# Altium PCB PCB_SWatch_VER1.PcbDoc
Units mm, origin at the board's own origin, x right, y up, seen from the top; angles counter-clockwise.
Board outline 38 x 46 mm, 2 copper layers (Top Layer, Bottom Layer); 57 components, 42 nets, 244 pads, 86 vias.
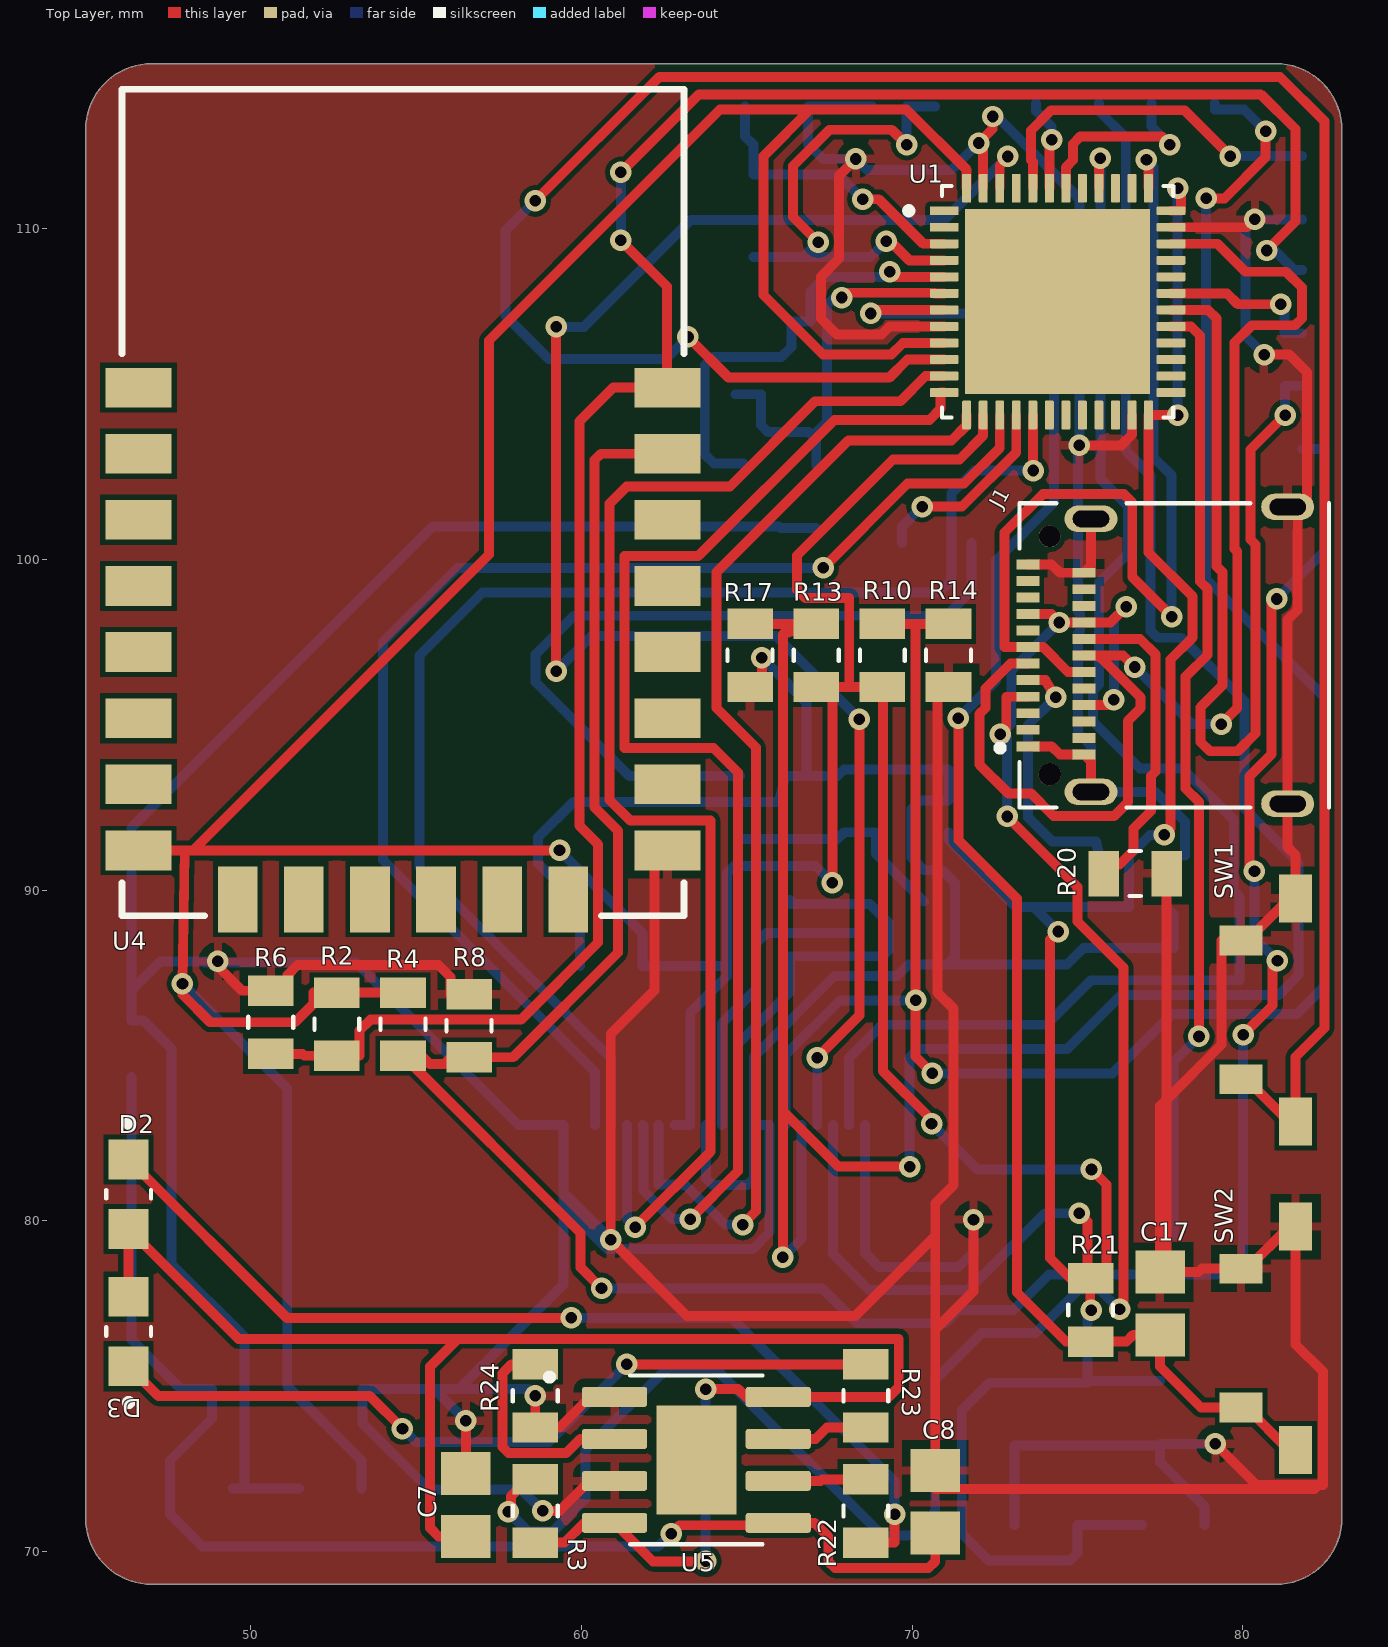
[diagram p0: Top Layer view]
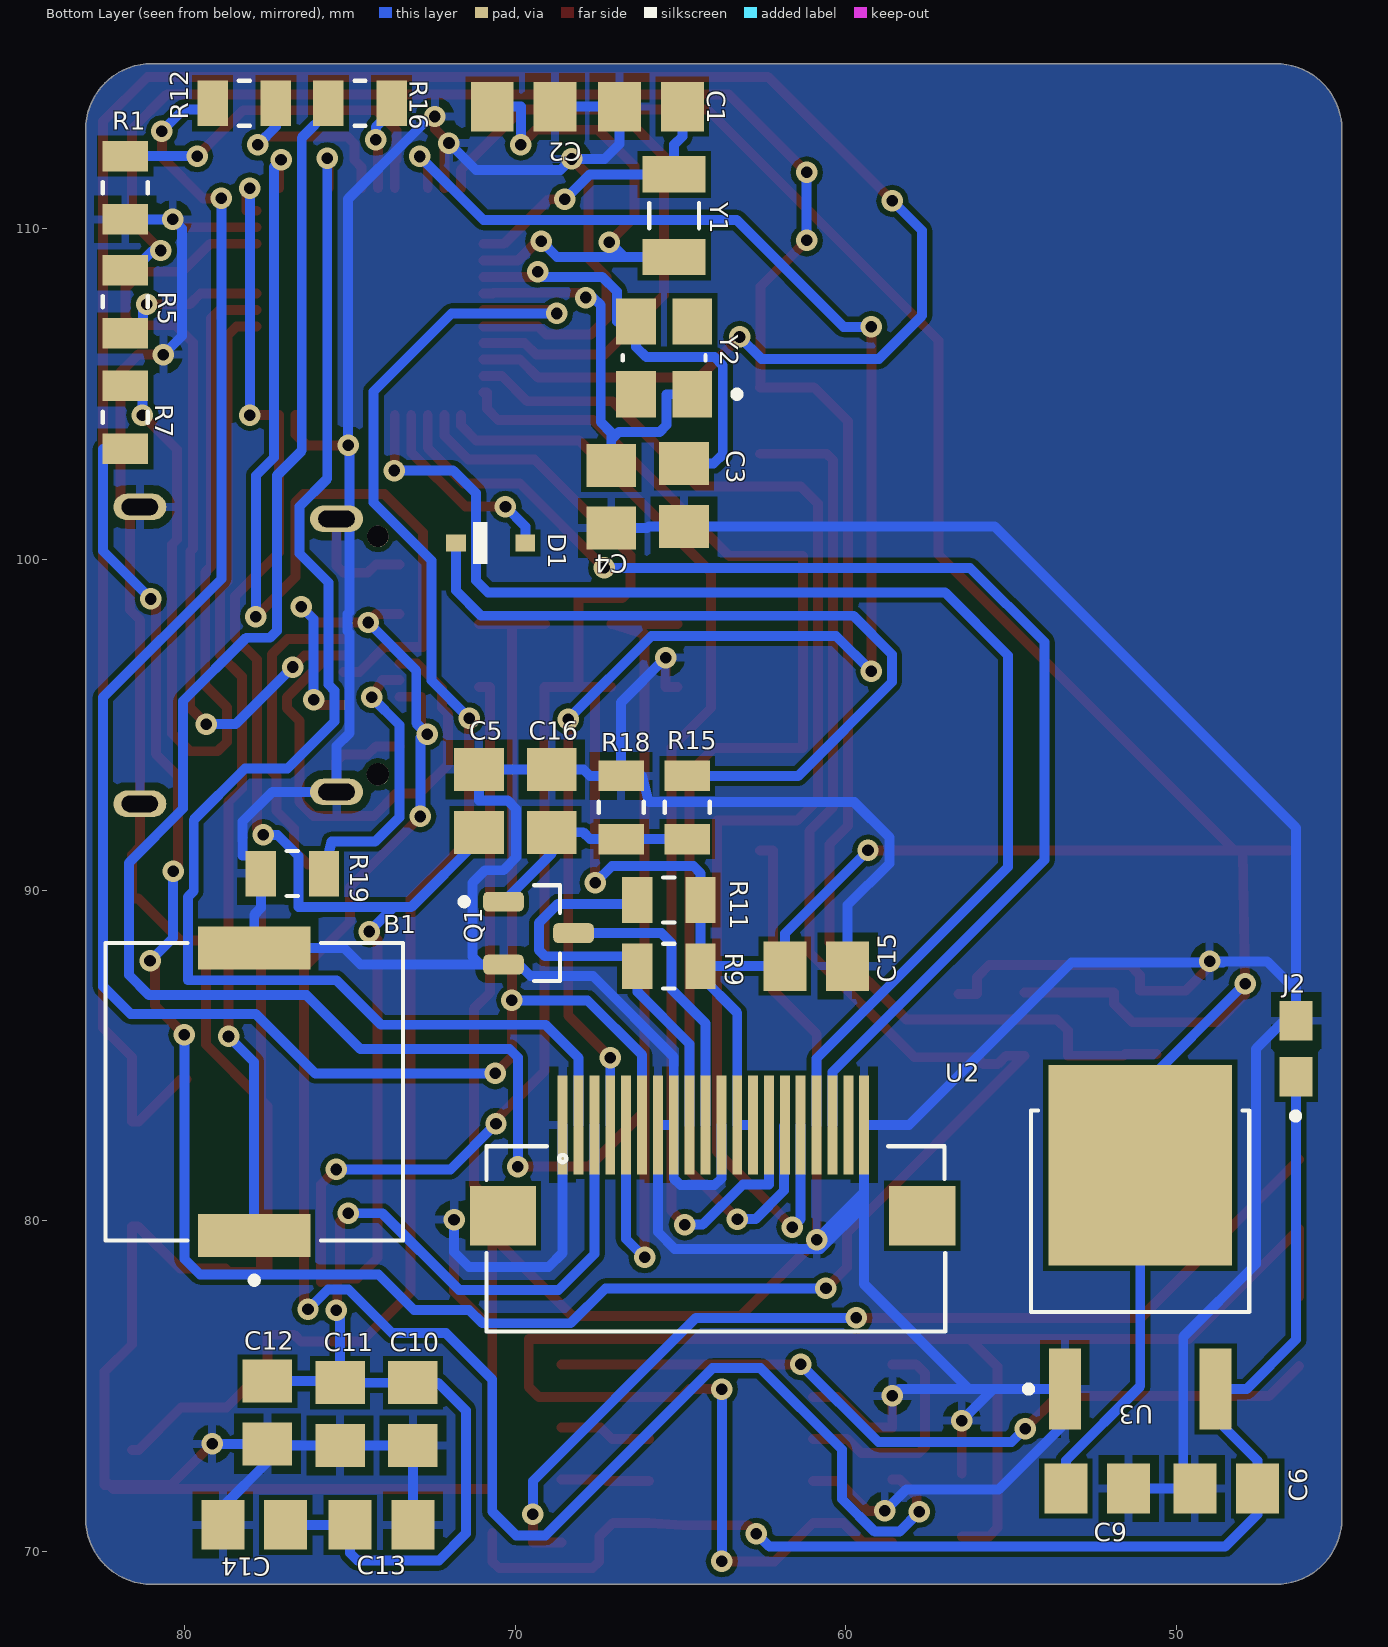
[diagram p1: Bottom Layer view, seen from below]
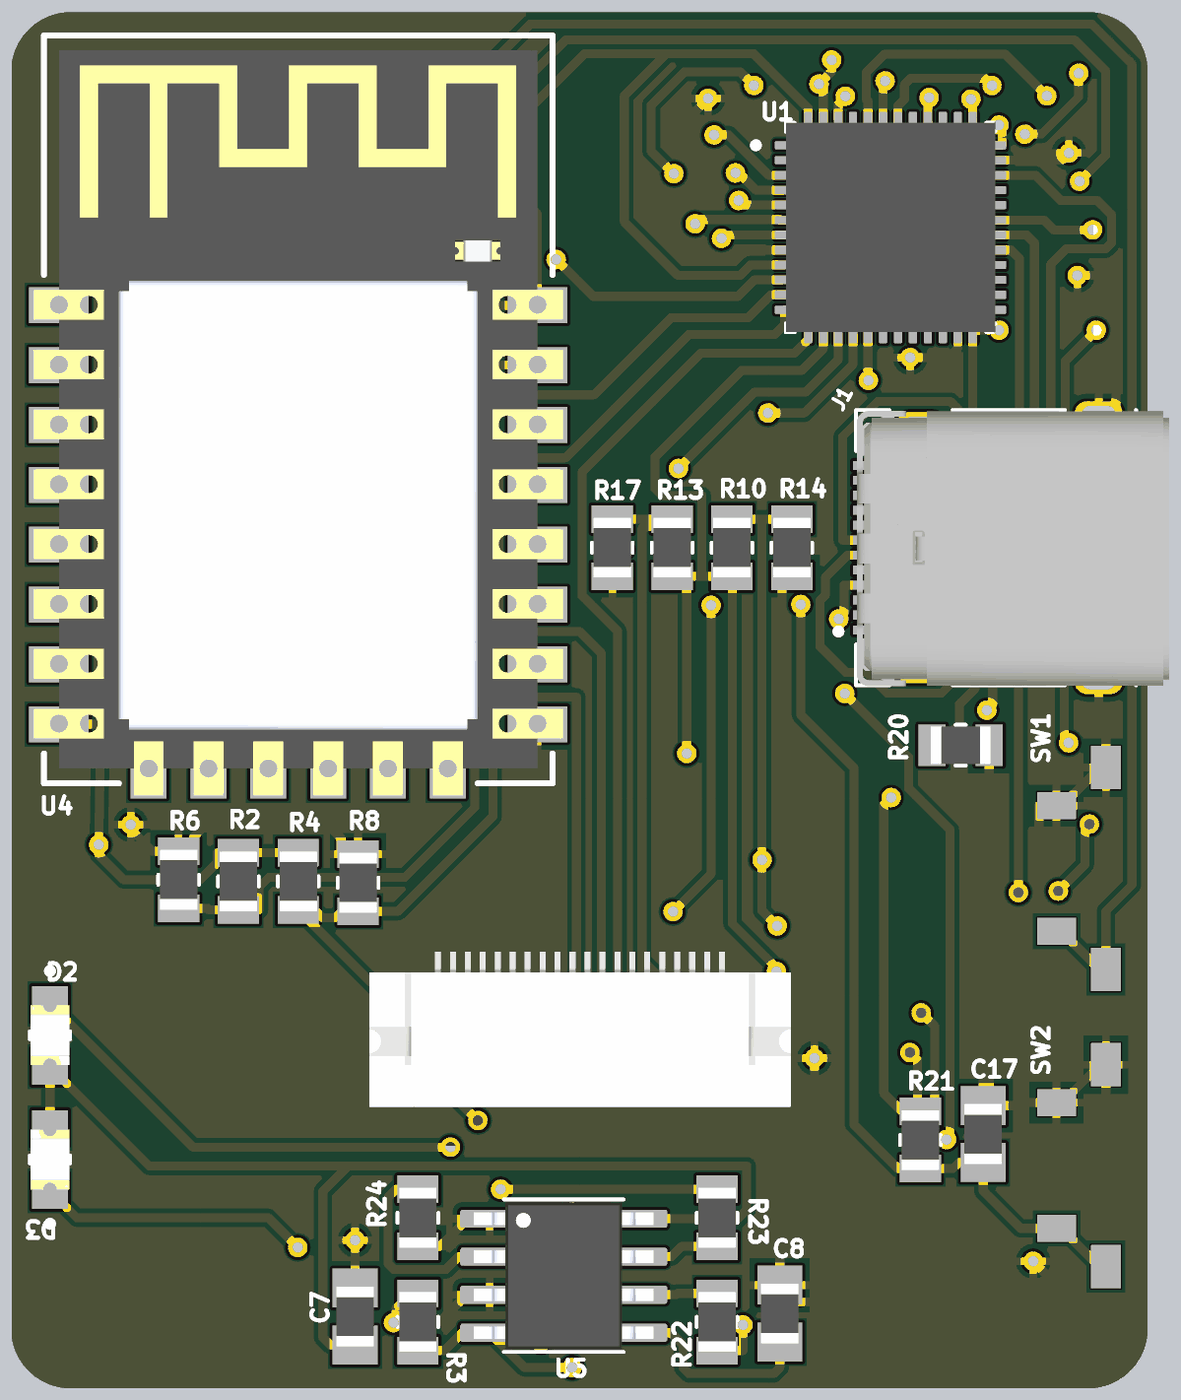
[diagram p2: 3D render of the assembled board from above, using the file's embedded part models]
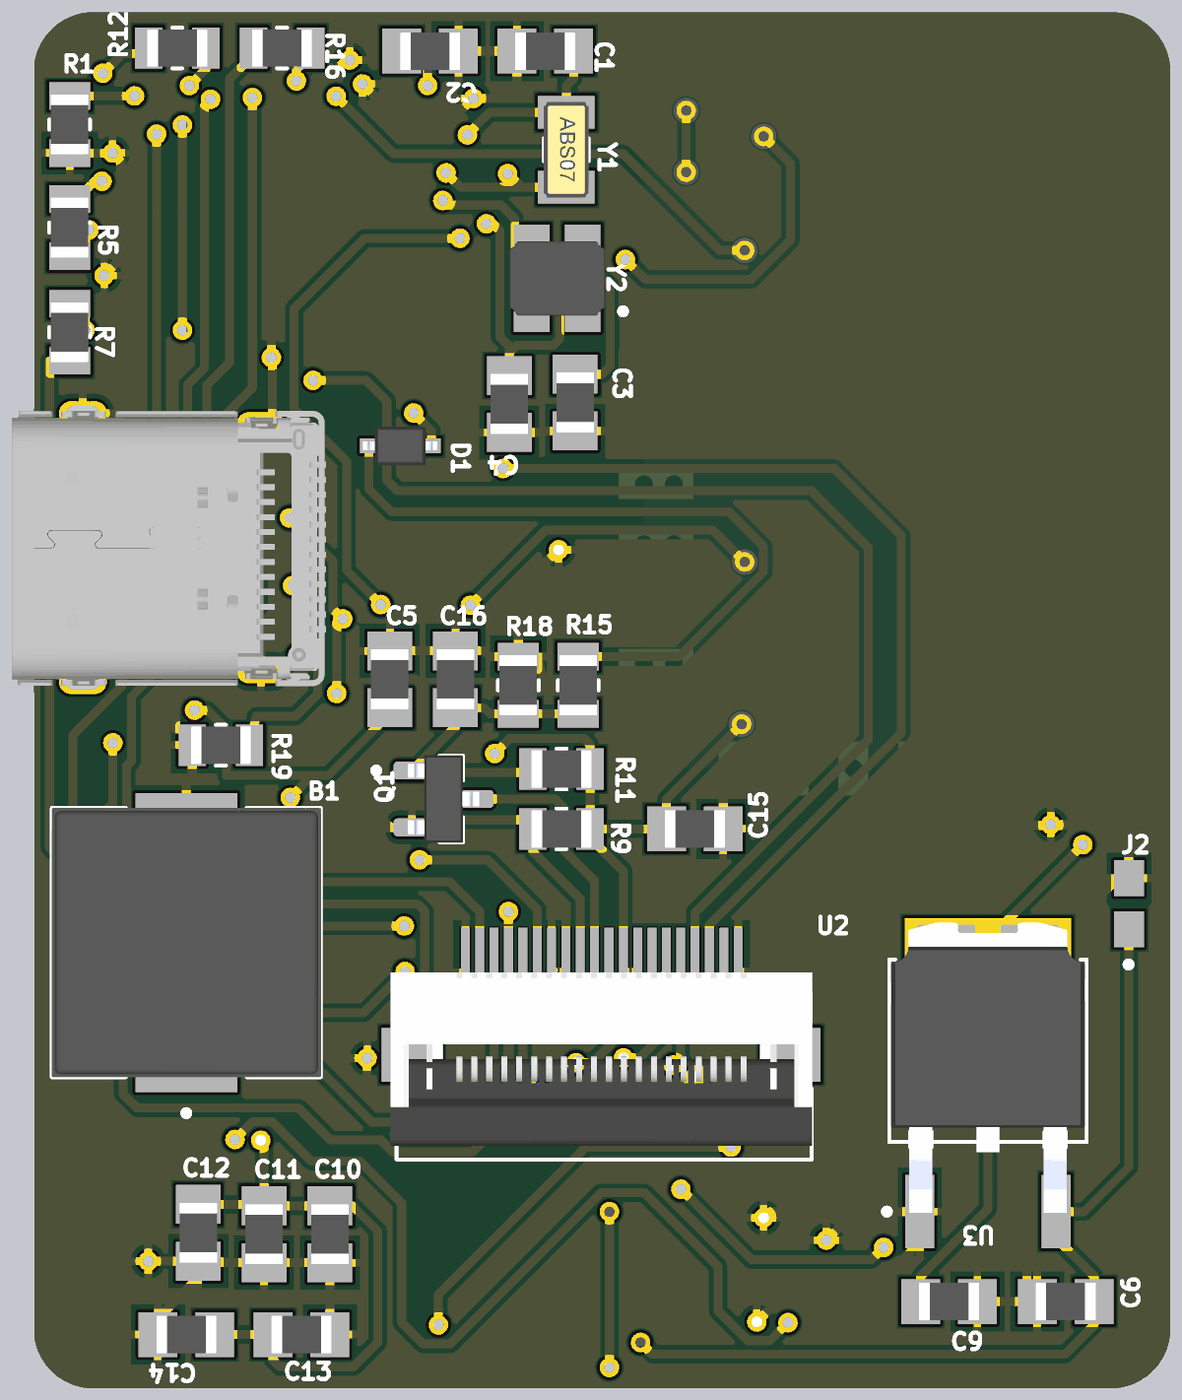
[diagram p3: 3D render of the assembled board from below, using the file's embedded part models]

## Layer stack, top to bottom
Top Solder: solder mask 0.0102, Solder Resist, Dk 3.5
Top Layer: signal copper 0.0356
Dielectric 1: dielectric 0.32, FR-4, Dk 4.8
Bottom Layer: signal copper 0.0356
Bottom Solder: solder mask 0.0102, Solder Resist, Dk 3.5

## Board outline
47,69 cw(c47,71) 45,71 45,113 cw(c47,113) 47,115 81,115 cw(c81,113) 83,113 83,71 cw(c81,71) 81,69

## Design rules (kind name [scope] priority, off if disabled: settings)
Clearance [All] p1: gap=0.152 ignorepadtopadclearanceinfootprint=FALSE
HoleSize [All] p1: absolutevalues=TRUE maxlimit=3.5 minlimit=0.025 maxpercent=80.000 minpercent=20.000
HoleToHoleClearance [All] p1: gap=0.056 allowstackedmicrovias=TRUE
MinimumSolderMaskSliver [All] p1: minsoldermaskwidth=0.003
PolygonConnect [All] p1: connectstyle=Relief reliefconductorwidth=0.254 reliefentries=4 polygonreliefangle="90 Angle" airgapwidth=0.254
RoutingVias [All] p1: holewidth=0.35 width=0.65 viastyle="Through Hole" minholewidth=0.3 minwidth=0.6 maxholewidth=0.4 maxwidth=0.8
SilkToSilkClearance [All] p1: silktosilkclearance=0.008
SilkToSolderMaskClearance [IsPad] p1: minsilkscreentomaskgap=0.01 clearancetoexposedcopper=TRUE
SolderMaskExpansion [All] p1: expansion=0.102
Width [All] p1: maxlimit=0.5 minlimit=0.254 preferedwidth=0.3 minimp=50.000000 maximp=50.000000 favimp=50.000000
25 further rules are at their usual default settings.

## Classes and differential pairs
component class SWatch_Schematic_2: B1 C6 C7 C8 C9 C17 D2 D3 J1 J2 R3 R19 R20 R21 R22 R23 R24 SW2 U3 U4 U5
component class SWatch_Schematic_1: C1 C2 C3 C4 C5 C10 C11 C12 C13 C14 C15 C16 D1 Q1 R1 R2 R4 R5 R6 R7 R8 R9 R10 R11 R12 R13 R14 R15 R16 R17 R18 SW1 U1 U2 Y1 Y2

## Components (designator, comment, footprint, x,y, rotation, side; value= is the part's Value field where it differs from the comment)
B1 "SMD BUZZER" "SMD BUZZER" 77.9,83.9 r90 bottom
C1 "4.3pF" "4.3 pF C805" 65.9,113.7 r180 bottom
C2 "4.3pF" "4.3 pF C805" 69.75,113.7 r0 bottom
C3 "12pF" "12pF C805" 64.9,101.95 r90 bottom
C4 "12pF" "12pF C805" 67.1,101.9 r90 bottom
C5 "0.1 uF C805" "0.1 uF C805" 71.1,92.7 r90 bottom
C6 "100 nF" "100 nF C805" 48.5,71.9 r0 bottom
C7 "10 uF" "10uF C805" 56.5,71.4 r90 top
C8 "10 uF" "10uF C805" 70.7,71.5 r90 top
C9 "10 uF" "10uF C805" 52.4,71.9 r180 bottom
C10 "100 nF" "100 nF C805" 73.1,74.15 r270 bottom
C11 "100 nF" "100 nF C805" 75.3,74.15 r270 bottom
C12 "100 nF" "100 nF C805" 77.5,74.2 r270 bottom
C13 "100 nF" "100 nF C805" 74.05,70.8 r180 bottom
C14 "100 nF" "100 nF C805" 77.9,70.8 r0 bottom
C15 "1 uF C805" "1 uF C805" 60.9,87.7 r0 bottom
C16 "10nF C805" "4.3 pF C805" 68.9,92.7 r270 bottom
C17 "100 nF" "100 nF C805" 77.5,77.5 r90 top
D1 "1N4148WS-7-F Diyot" "1N4148WS-7-F Diyot" 70.75,100.5 r180 bottom
D2 "805 led" led 46.3,80.8 r270 top
D3 "805 led" led 46.3,76.65 r90 top
J1 "12401832E402A TYPE-C" "12401832E402A TYPE-C" 74.16,97.1 r90 top
J2 "BAT +-" "BAT -+" 46.4,85.2 r90 bottom
Q1 "BC848CLT1G NPN Transistör" "BC848CLT1G NPN Transistör" 69.3,88.7 r180 bottom
R1 "10K R805" "10K R805" 81.8,111.245 r270 bottom
R2 "10K R805" "10K R805" 52.6,85.945 r90 top
R3 "0.4 ohm R805" "1K R805" 58.6,71.22 r90 top
R4 "10K R805" "10K R805" 54.6,85.945 r90 top
R5 "10K R805" "10K R805" 81.8,107.8 r270 bottom
R6 "10K R805" "10K R805" 50.6,86 r270 top
R7 "10K R805" "10K R805" 81.8,104.3 r90 bottom
R8 "10K R805" "10K R805" 56.6,85.9 r270 top
R9 "RA1 R805" "1K R805" 65.355,87.7 r0 bottom
R10 "10K R805" "10K R805" 69.1,97.1 r270 top
R11 "RA2 R805" "1K R805" 65.355,89.7 r0 bottom
R12 "10K R805" "10K R805" 78.2,113.8 r0 bottom
R13 "10K R805" "10K R805" 67.1,97.1 r270 top
R14 "10K R805" "10K R805" 71.1,97.1 r90 top
R15 "1K R805" "1K R805" 64.8,92.5 r270 bottom
R16 "10K R805" "10K R805" 74.7,113.8 r0 bottom
R17 "10K R805" "10K R805" 65.1,97.1 r90 top
R18 "5k R805" "1.2K R805" 66.8,92.5 r270 bottom
R19 "5.1K R805" "1K R805" 76.745,90.5 r180 bottom
R20 "5.1K R805" "1K R805" 76.745,90.5 r0 top
R21 "10K R805" "10K R805" 75.4,77.3 r270 top
R22 "1K R805" "1K R805" 68.6,71.22 r270 top
R23 "1K R805" "1K R805" 68.6,74.7 r90 top
R24 "1.2K R805" "1.2K R805" 58.6,74.7 r270 top
SW1 "WakeUP BTN" "WakeUp BTN" 81.5,86.43 r90 top
SW2 "WakeUP BTN" "WakeUp BTN" 81.5,76.5 r90 top
U1 "STM32F411CEU6" STM32F411CEU6 74.4,107.8 r0 top
U2 "FPC" FPC 63.82,82.9 r180 bottom
U3 "LD1117DT3.3V" LD1117DT3.3V 51.1,79.2 r90 bottom
U4 "ESP8266" ESP8266 54.6,101.72 r0 top
U5 "TP4056" TP4056 63.475,72.765 r0 top
Y1 "RTC Kristal" "32.768 KHZ RTC" 65.2,110.4 r270 bottom
Y2 "ABM8G25000MHZ4YT3" ABM8G25000MHZ4YT3 65.5,106.1 r0 bottom

## Footprints (in the part's own frame and the unit in brackets; to place one, negate y for a bottom-side part, rotate by r counter-clockwise, add the part's x,y. Pads: shape width x height; smd on the part's side, far side on the other; paste and mask are expansions set on the pad)
"0.1 uF C805" [mm]
  rect 1.3x1.5 smd: 1(-0.95,0) 2(0.95,0)
  body extent -1,-0.62 1,0.63, height 0.3
"1 uF C805" [mm]
  rect 1.3x1.5 smd: 1(-0.95,0) 2(0.95,0)
  body extent -1,-0.62 1,0.63, height 0.3
"1.2K R805" [mm]
  rect 0.92x1.38 smd: 1(-0.955,0) 2(0.955,0)
  silkscreen extent -0.17,-0.68 0.17,0.68, body extent -1,-0.62 1,0.63, height 0.6
"1K R805" [mm]
  rect 0.92x1.38 smd: 1(-0.955,0) 2(0.955,0)
  silkscreen extent -0.17,-0.68 0.17,0.68, body extent -1,-0.62 1,0.62, height 0.6
"1N4148WS-7-F Diyot" [mm]
  rect 0.6x0.5 smd: A(1.05,0) C(-1.05,0)
  silkscreen extent -0.53,-0.63 -0.1,0.63, body extent -1.25,-0.65 1.25,0.65, height 1.2
"4.3 pF C805" [mm]
  rect 1.3x1.5 smd: 1(-0.95,0) 2(0.95,0)
  body extent -1,-0.62 1,0.63, height 0.3
"10K R805" [mm]
  rect 0.92x1.38 smd: 1(-0.955,0) 2(0.955,0)
  silkscreen extent -0.17,-0.68 0.17,0.68, body extent -1,-0.62 1,0.63, height 0.6
"10uF C805" [mm]
  rect 1.3x1.5 smd: 1(-0.95,0) 2(0.95,0)
  body extent -1,-0.62 1,0.63, height 0.3
"12pF C805" [mm]
  rect 1.3x1.5 smd: 1(-0.95,0) 2(0.95,0)
  body extent -1,-0.62 1,0.63, height 0.3
"32.768 KHZ RTC" [mm]
  rect 1.1x1.9 smd: 1(-1.25,0) 2(1.25,0)
  silkscreen extent -0.38,-0.75 0.38,0.75, body extent -1.6,-0.75 1.6,0.75, height 0.89
"100 nF C805" [mm]
  rect 1.3x1.5 smd: 1(-0.95,0) 2(0.95,0)
  body extent -1,-0.62 1,0.63, height 0.3
"12401832E402A TYPE-C" [mm]
  rect 0.3x0.7 smd: A1(-2.75,0.66) A2(-2.25,0.66) A3(-1.75,0.66) A4(-1.25,0.66) A5(-0.75,0.66) A6(-0.25,0.66) A7(0.25,0.66) A8(0.75,0.66) A9(1.25,0.66) A10(1.75,0.66) A11(2.25,0.66) A12(2.75,0.66) B1(2.5,-1.04) B2(2,-1.04) B3(1.5,-1.04) B4(1,-1.04) B5(0.5,-1.04) B6(0,-1.04) B7(-0.5,-1.04) B8(-1,-1.04) B9(-1.5,-1.04) B10(-2,-1.04) B11(-2.5,-1.04) B12(-3,-1.04)
  oval 0.8x1.6 hole 0.5 slot 1.1 at 90 deg: S1(-4.13,-1.25) S2(4.13,-1.25) S3(4.49,-7.2) S4(-4.49,-7.2)
  round 0.675 hole 0.675 unplated: ""(-3.6,0)
  round 0.65 hole 0.65 unplated: ""(3.6,0)
  silkscreen extent -4.6,-8.45 4.6,1.6, body extent -4.63,-9.56 4.57,0.93, height 1.7
ABM8G25000MHZ4YT3 [mm]
  rect 1.2x1.4 smd: 1(-0.85,1.1) 2(-0.85,-1.1) 3(0.85,-1.1) 4(0.85,1.1)
  silkscreen extent -2.3,-0.08 1.25,1.2, body extent -1.6,-1.24 1.6,1.24, height 0.99
"BAT -+" [mm]
  rect 1.2x1 smd: 1(-0.85,-0.015) 2(0.85,-0.015)
  silkscreen extent -2.08,-0.05 -1.98,0.05
"BC848CLT1G NPN Transistör" [mm]
  rrect50% 1.23x0.6 smd: 1(-1.06,0.95) 2(-1.06,-0.95) 3(1.06,0)
  silkscreen extent -2.35,-1.45 0.65,1.45, body extent -1.2,-1.46 1.2,1.46, height 1.2
ESP8266 [mm]
  rect 2x1.2 smd: 1(-8,3.48) 2(-8,1.48) 3(-8,-0.52) 4(-8,-2.52) 5(-8,-4.52) 6(-8,-6.52) 7(-8,-8.52) 8(-8,-10.52) 15(8,-10.52) 16(8,-8.52) 17(8,-6.52) 18(8,-4.52) 19(8,-2.52) 20(8,-0.52) 21(8,1.48) 22(8,3.48)
  rect 1.2x2 smd: 9(-5,-12) 10(-3,-12) 11(-1,-12) 12(1,-12) 13(3,-12) 14(5,-12)
  silkscreen extent -8.5,-12.5 8.5,12.5, body extent -8.85,-12.9 8.85,12
FPC [mm]
  rect 0.3x3 smd mask+0.05: 1(-4.75,0) 2(-4.27,0) 3(-3.79,0) 4(-3.31,0) 5(-2.83,0) 6(-2.35,0) 7(-1.87,0) 8(-1.39,0) 9(-0.91,0) 10(-0.43,0) 11(0.05,0) 12(0.53,0) 13(1.01,0) 14(1.49,0) 15(1.97,0) 16(2.45,0) 17(2.93,0) 18(3.41,0) 19(3.89,0) 20(4.37,0)
  rect 2x1.8 smd: S1(-6.55,-2.75) S2(6.125,-2.75)
  silkscreen extent -7.05,-6.25 6.82,-0.65, body extent -7.25,-5.8 6.85,0.7, height 1.1
LD1117DT3.3V [mm]
  rect 2.44x0.97 smd: 1(-4.29,2.28) 3(-4.29,-2.28)
  rect 6.07x5.55 smd paste-4: 4(2.48,0)
  silkscreen extent -4.39,-3.3 4.13,3.48, body extent -4.36,-3.25 5.36,3.25, height 2.17
led [mm]
  rect 1.2x1.2 smd: 1(-1.05,0) 2(1.05,0)
  silkscreen extent -2.25,-0.67 0.13,0.68, body extent -1,-0.65 1,0.65, height 0.8
"SMD BUZZER" [mm]
  rect 1.3x3.4 smd: 1(-4.35,0) 2(4.35,0)
  silkscreen extent -5.8,-4.5 4.5,4.5, body extent -4.5,-4.5 4.5,4.5, height 1.9
STM32F411CEU6 [mm]
  rrect25% 0.87x0.27 smd: 1(-3.429,2.75) 2(-3.43,2.25) 3(-3.43,1.75) 4(-3.43,1.25) 5(-3.43,0.75) 6(-3.43,0.25) 7(-3.43,-0.25) 8(-3.43,-0.75) 9(-3.43,-1.25) 10(-3.43,-1.75) 11(-3.43,-2.25) 12(-3.43,-2.75) 25(3.43,-2.75) 26(3.43,-2.25) 27(3.43,-1.75) 28(3.43,-1.25) 29(3.43,-0.75) 30(3.43,-0.25) 31(3.43,0.25) 32(3.43,0.75) 33(3.43,1.25) 34(3.43,1.75) 35(3.43,2.25) 36(3.43,2.75)
  rrect25% 0.27x0.87 smd: 13(-2.75,-3.43) 14(-2.25,-3.43) 15(-1.75,-3.43) 16(-1.25,-3.43) 17(-0.75,-3.43) 18(-0.25,-3.43) 19(0.25,-3.43) 20(0.75,-3.43) 21(1.25,-3.43) 22(1.75,-3.43) 23(2.25,-3.43) 24(2.75,-3.43) 37(2.75,3.43) 38(2.25,3.43) 39(1.75,3.43) 40(1.25,3.43) 41(0.75,3.43) 42(0.25,3.43) 43(-0.25,3.43) 44(-0.75,3.43) 45(-1.25,3.43) 46(-1.75,3.43) 47(-2.25,3.43) 48(-2.75,3.43)
  rect 5.6x5.6 smd paste-4: 49(0,0)
  silkscreen extent -4.6,-3.5 3.5,3.5, body extent -3.5,-3.5 3.5,3.5, height 0.6
TP4056 [mm]
  rrect25% 1.97x0.6 smd: 1(-2.475,1.905) 2(-2.475,0.635) 3(-2.475,-0.635) 4(-2.475,-1.905) 5(2.475,-1.905) 6(2.475,-0.635) 7(2.475,0.635) 8(2.475,1.905)
  rect 2.413x3.302 smd paste-3: 9(0,0)
  silkscreen extent -4.54,-2.55 2,2.6, body extent -3,-2.45 3,2.45, height 1.75
"WakeUp BTN" [mm]
  rect 1.45x1 smd mask+0.05: 1(-3.43,-0.1) 2(3.32,-0.1)
  rect 0.9x1.3 smd mask+0.05: 3(-2.15,1.55) 4(2.05,1.55)

## Part data
B1: "PKMCS0909E4000-R1"

## Via types
v1: diameter 0.65, hole 0.35, Top Layer to Bottom Layer, 86 vias

## Nets (pads, with @x,y where several pads share a name; then routed paths per layer and width w, separated by ;. In a path a pad name is that pad's centre, name@x,y a point inside that pad or via, vN(x,y) a via of type N, cw(c..) or ccw(c..) an arc to the next point about the centre after c; other vN are vias at no path point)
3.3V: C5.1 C9.1 C10.1 C11.1 C12.1 C13.1 C14.1 C15.2 R2.2 R4.2 R9.1 R10.2 R11.1 R13.2 R21.1 U1.9 U1.14 U1.24 U1.36 U1.48 U2.3 U2.12 U2.13 U3.4 U4.8 | length 235.3
  Top Layer w0.3: U4.8 48,91.2 ; R4.2 R2.2 51.892,86.9 51.892,86.563 51.333,86.004 48.768,86.004 47.93,86.843 v1(47.93,87.173) 48,91.2 ; v1(59.334,91.2) 48.249,91.2 ; R13.2 R13.2@67.589,96.145 ; v1(67.589,90.221) R13.2@67.589,96.145 ; v1(70.587,82.931) 70.587,83.058 69.113,84.531 69.113,96.145 R10.2 68.097,96.145 ; U1.9 69.72,106.55 69.37,106.2 67.3,106.2 65.5,108 65.5,112.2 66.914,113.614 ; U1.48 71.65,111.789 69.825,113.614 66.914,113.614 ; U1.14 72.15,103.748 71.428,103.026 69.426,103.026 66.523,100.123 66.523,99.077 66.769,98.831 68.097,98.831 68.097,96.145 ; v1(74.422,88.748) 74.175,88.501 74.175,78.875 74.795,78.255 R21.1@75.159,78.255 ; v1(75.05,80.225) 75.3,79.975 75.3,78.396 R21.1@75.159,78.255 ; v1(75.413,77.292) 75.387,77.318 R21.1@75.387,78.255 ; v1(75.425,81.55) 75.875,81.1 75.875,78.152 75.399,78.252 R21.1@75.387,78.255 ; U1.24 U1.24@77.15,104.369 ; v1(77.622,91.669) 77.815,91.862 77.815,96.971 78.478,97.634 78.478,98.888 77.15,100.216 U1.24@77.15,104.369 ; U1.36 78.13,110.55 78.13,111.125 v1(78.029,111.227) ; v1(78.029,104.369) U1.24@77.15,104.369 ; 48,91.2 48.249,91.2 ; 48.249,91.2 57.201,100.152 57.201,106.629 64.186,113.614 66.914,113.614 ; R13.2@67.589,96.145 68.097,96.145 ; R21.1@75.159,78.255 R21.1@75.387,78.255
  Bottom Layer w0.3: v1(47.93,87.173) 51.1,84.003 U3.4 51.1,74.996 53.35,72.746 C9.1 ; v1(59.334,91.2) 61.85,88.684 C15.2 R9.1 ; U2.13 U2.12 63.29,86.29 64.4,87.4 R9.1 ; v1(67.589,90.221) 67.081,90.729 64.618,90.729 64.4,90.511 R11.1 R9.1 ; U2.3 67.61,78.99 68.7,77.9 71.7,77.9 74.025,80.225 v1(75.05,80.225) ; v1(70.587,82.931) 71.968,81.55 v1(75.425,81.55) ; C5.1 71.1,91.536 73.152,89.484 73.685,89.484 ; v1(74.422,88.748) 73.685,89.484 ; v1(75.413,77.292) 75.3,77.18 C11.1 ; C14.1 C13.1 75,69.945 74.778,69.723 72.314,69.723 71.5,70.537 71.5,74.261 72.339,75.1 C10.1 C11.1 ; C12.1 75.35,75.15 C11.1 ; v1(77.622,91.669) 77.191,91.669 76.556,91.034 76.556,89.484 73.685,89.484 ; v1(78.029,104.369) v1(78.029,111.227)
GND: B1.2 C1.1 C2.1 C3.1 C4.1 C5.2 C6.2 C7.2 C8.2 C9.2 C10.2 C11.2 C12.2 C13.2 C14.2 C15.1 C16.1 C17.2 J1.A1 J1.A12 J1.B1 J1.B12 J1.S1 J1.S2 J1.S3 J1.S4 J2.2 Q1.2 R1.2 R6.1 R8.1 R14.1 R17.1 R18.1 R19.1 R20.2 R24.2 SW1.2 SW1.4 SW2.2 SW2.4 U1.8 U1.23 U1.35 U1.47 U2.1 U2.7 U2.8 U2.11 U2.20 U3.1 U4.15 U5.1 U5.3 | length 382.7
  Top Layer w0.3: v1(49,87.844) 49,87.688 49.733,86.955 R6.1 51.105,86.955 51.105,87.427 51.41,87.732 55.677,87.732 56.032,87.376 56.032,86.855 R8.1 ; C7.2 v1(56.5,73.954) ; v1(58.598,74.701) 58.6,74.699 R24.2 59.334,73.745 60.259,74.67 U5.1 ; v1(58.826,71.222) 59.334,71.222 60.243,72.13 U5.3 ; U4.15 62.205,91.2 62.205,86.97 60.884,85.649 v1(60.884,79.426) 63.194,77.115 68.281,77.115 70.7,79.535 ; R17.1 65.456,96.145 v1(65.456,97.028) ; v1(68.301,112.116) 67.793,111.608 67.793,109.102 67.242,108.552 67.242,107.29 67.72,106.811 69.078,106.811 69.317,107.05 U1.8 ; R14.1 70.772,96.145 70.772,86.897 71.258,86.412 71.258,81.08 70.7,80.522 70.7,79.535 ; v1(71.857,80.035) 71.857,77.865 70.7,76.708 ; v1(72.009,112.598) 72.434,113.023 v1(72.434,113.4) ; U1.47 v1@72.15,112.457 ; J1.A1 74.219,94.35 74.469,94.1 J1.B12 75.41,93.89 J1.S1 ; J1.A12 74.219,99.85 74.469,99.6 J1.B1 75.41,99.81 J1.S2 ; v1(75.057,103.454) 76.327,103.454 76.65,103.777 U1.23 ; R20.2 77.7,83.669 ; U1.35 80.126,110.05 v1(80.366,110.29) ; v1(79.172,73.25) 80.413,72.009 82.296,72.009 ; v1(80.645,106.197) 81.407,106.197 81.94,105.664 81.94,101.59 J1.S3@81.653,101.59 ; J1.S3 J1.S3@81.653,101.59 ; 70.7,76.708 70.7,79.535 ; 70.7,76.708 C8.2 70.7,71.882 82.169,71.882 82.296,72.009 ; C17.2@77.7,78.45 78.664,78.45 78.764,78.55 SW2.4 80.137,78.55 81.407,79.82 SW2.2 81.6,76.261 82.423,75.438 82.423,72.136 ; C17.2@77.7,78.45 77.7,83.669 ; C17.2@77.7,78.45 C17.2 77.5,83.469 77.7,83.669 ; 77.7,83.669 79.361,85.33 79.361,88.48 SW1.4 80.137,88.48 81.407,89.75 SW1.2 81.6,91.059 81.36,91.299 J1.S4 81.356,92.61 81.356,98.179 81.653,98.476 J1.S3@81.653,101.59 ; 82.296,72.009 82.423,72.136 ; 82.296,72.009 82.423,72.009 82.423,72.136
  Bottom Layer w0.3: J2.2 J2.2@46.385,86.055 ; 48.601,87.812 53.183,87.812 58.095,82.9 U2.20 59.45,80.86 ; v1(49,87.844) 47.26,87.844 46.385,86.97 ; C6.2 C9.2 ; C6.2@49.8,71.9 49.8,76.489 47.6,78.689 47.6,85.2 46.745,86.055 J2.2@46.385,86.055 ; U3.1 U3.1@53.38,74.905 ; v1(56.5,73.954) 55.55,74.905 ; v1(58.598,74.701) 58.395,74.905 56.277,74.905 ; v1(58.826,71.222) 58.176,71.872 55.382,71.872 53.38,73.874 U3.1@53.38,74.905 ; C15.1 59.95,89.548 58.688,90.81 58.688,91.598 59.749,92.659 65.964,92.659 66.167,93.455 R18.1 ; v1(60.884,79.426) 59.45,80.86 ; U2.11 63.77,81.28 63.973,81.077 65.007,81.077 65.21,81.28 U2.8 ; v1(65.456,97.028) 66.8,95.684 R18.1 ; C4.1 66.014,100.95 65.964,101 C3.1 55.5,101 46.385,91.885 46.385,86.97 ; U2.1 68.57,79.03 69,78.6 71.4,78.6 71.857,79.057 v1(71.857,80.035) ; C2.1 C1.1 66.85,112.573 67.307,112.116 v1(68.301,112.116) 68.631,111.785 71.196,111.785 v1(72.009,112.598) ; v1(72.434,113.4) 72.568,113.4 73.16,112.808 75.057,110.911 v1(75.057,103.454) ; C13.2 C10.2 C11.2 77.45,73.2 C12.2 ; v1@75.184,103.454 75.019,103.29 75.019,98.41 75.074,98.355 75.074,97.835 75.019,97.78 75.019,94.746 75.41,94.356 J1.S1 77.354,92.97 78.249,92.075 78.249,91.04 77.7,91.04 R19.1 77.7,89.456 77.9,89.256 B1.2 75.184,88.25 74.684,87.75 71.062,87.75 ; J1.S2@75.286,101.23 J1.S2 ; C14.2 78.85,71.349 77.5,72.699 C12.2 ; v1(79.172,73.25) C12.2 ; v1(80.645,106.197) 80.086,106.756 80.086,110.011 v1(80.366,110.29) R1.2 ; J2.2@46.385,86.055 46.385,86.97 ; U3.1@53.38,74.905 55.55,74.905 ; 55.55,74.905 56.277,74.905 ; 56.277,74.905 59.45,78.078 59.45,80.467 ; 59.45,80.467 60.771,79.146 65.182,79.146 65.69,79.654 U2.7 U2.8 ; 59.45,80.467 59.45,80.86 ; U2.8 65.21,84.955 67.655,87.4 69.544,87.4 69.894,87.75 Q1.2 71.062,87.75 ; R18.1 67.742,93.455 67.937,93.65 C16.1 C5.2 71.1,92.71 70.231,92.71 69.977,92.456 69.977,90.983 70.36,90.6 70.919,90.6 71.298,90.221 71.298,87.986 71.062,87.75
NetB1_1: B1.1 U1.29 | length 29.1
  Top Layer w0.3: U1.29 78.435,107.05 78.706,106.779 78.706,99.34 78.93,99.116 78.93,97.116 78.271,96.456 78.271,93.079 78.677,92.672 v1(78.677,85.573)
  Bottom Layer w0.3: B1.1 77.902,79.55 77.902,84.797 v1(78.677,85.573)
NetC1_2: C1.2 U1.3 Y1.1 | length 8.8
  Top Layer w0.3: v1(68.504,110.896) 68.991,110.896 70.337,109.55 U1.3
  Bottom Layer w0.3: C1.2 64.95,112.797 65.2,112.547 Y1.1 67.75,111.65 v1(68.504,110.896)
NetC2_2: C2.2 U1.4 Y1.2 | length 15.5
  Top Layer w0.3: v1(67.158,109.601) 66.4,110.359 66.4,111.9 67.5,113 69.381,113 v1(69.832,112.55) ; v1(69.215,109.626) 69.339,109.626 69.915,109.05 U1.4
  Bottom Layer w0.3: Y1.2 66.707,109.15 ; v1(67.158,109.601) 66.707,109.15 ; v1(69.215,109.626) 68.739,109.15 66.707,109.15 ; v1(69.832,112.55) 69.832,113.7 C2.2
NetC3_2: C3.2 U1.5 Y2.3 | length 13.4
  Top Layer w0.3: v1(69.324,108.704) 69.479,108.55 U1.5
  Bottom Layer w0.3: C3.2 64.008,102.9 63.729,103.179 63.729,105.867 63.983,106.121 66.04,106.121 66.35,106.431 Y2.3 66.929,107.2 66.929,108.102 67.378,108.552 69.171,108.552 v1(69.324,108.704)
NetC4_2: C4.2 U1.6 Y2.1 | length 12.3
  Top Layer w0.3: v1(67.869,107.925) 68.013,108.069 70.685,108.069 70.685,108.05 U1.6
  Bottom Layer w0.3: Y2.1 65.43,105 65.43,104.064 65.634,103.861 66.871,103.861 67.1,103.632 ; C4.2 67.1,103.632 ; v1(67.869,107.925) 67.648,107.925 67.419,107.696 67.419,104.155 67.1,103.835 67.1,103.632
NetC7_1: C7.1 D2.2 D3.2 R3.1 U5.4 U5.8 | length 52.6
  Top Layer w0.3: D3.2 D2.2 49.621,76.429 56.261,76.429 ; C7.1 55.677,70.45 55.423,70.704 55.423,75.59 56.261,76.429 ; R3.1 59.487,70.265 60.082,70.86 U5.4 62.162,69.698 v1(63.754,69.698) ; v1(63.754,74.905) 64.739,74.905 64.973,74.67 U5.8 69.291,74.67 69.596,74.975 69.596,76.429 56.261,76.429
  Bottom Layer w0.3: v1(63.754,69.698) v1(63.754,74.905)
NetC16_2: C16.2 Q1.1 R15.2 R18.2 | length 6.9
  Bottom Layer w0.3: R15.2 R18.2 67.742,91.545 67.947,91.75 C16.2 68.9,91.11 Q1.1
NetC17_1: C17.1 R21.2 SW2.1 SW2.3 U1.7 | length 49.1
  Top Layer w0.3: v1(68.751,107.442) 68.859,107.55 U1.7 ; v1(71.399,95.199) 71.399,91.516 73.175,89.741 73.175,77.828 74.658,76.345 R21.2 76.483,76.345 76.688,76.55 C17.1 77.5,75.59 78.74,74.35 SW2.3 80.112,74.35 81.392,73.07 SW2.1
  Bottom Layer w0.3: v1(68.751,107.442) 71.933,107.442 74.295,105.08 74.295,101.727 72.542,99.974 72.542,96.342 v1(71.399,95.199)
NetD1_A: D1.A U1.16 | length 6
  Top Layer w0.3: v1(70.3,101.6) 71.511,101.6 73.15,103.239 U1.16
  Bottom Layer w0.3: D1.A 69.7,101 v1(70.3,101.6)
NetD1_C: D1.C R15.1 | length 23.6
  Bottom Layer w0.3: R15.1 61.444,93.455 58.606,96.293 58.606,97.13 59.776,98.3 71.04,98.3 71.8,99.06 D1.C
NetD2_1: D2.1 R22.2 | length 29.9
  Top Layer w0.3: D2.1 51.086,77.064 v1(59.69,77.064) ; R22.2 69.469,70.265 v1(69.469,71.12)
  Bottom Layer w0.3: v1(59.69,77.064) 64.536,77.064 69.469,72.131 v1(69.469,71.12)
NetD3_1: D3.1 R23.2 | length 24.2
  Top Layer w0.3: D3.1 47.199,74.701 53.594,74.701 v1(54.585,73.711) ; v1(61.366,75.655) R23.2
  Bottom Layer w0.3: v1(54.585,73.711) 54.991,73.304 59.016,73.304 v1(61.366,75.655)
NetJ1_A5: J1.A5 R19.2 | length 8.5
  Top Layer w0.3: J1.A5 74.033,96.35 v1(74.346,95.834)
  Bottom Layer w0.3: v1(74.346,95.834) 73.508,94.996 73.508,92.202 74.244,91.465 75.561,91.465 R19.2
NetJ1_A6: J1.A6 J1.B6 U1.34 | length 39
  Top Layer w0.3: J1.A6 72.974,96.85 72.221,96.097 72.221,95.513 72.042,95.334 72.042,93.794 72.908,92.928 73.595,92.928 74.281,92.242 76.113,92.242 76.53,92.659 76.53,95.124 76.908,95.502 76.908,95.835 75.691,97.052 75.648,97.052 75.6,97.1 ; J1.B6 75.6,97.1 ; v1(76.733,96.749) 76.382,97.1 75.6,97.1 ; U1.34 79.236,109.55 80.082,108.704 81.313,108.704 81.788,108.229 81.788,107.29 81.585,107.086 80.28,107.086 79.756,106.562 79.756,100.322 79.834,100.244 79.834,95.506 v1(79.35,95.021)
  Bottom Layer w0.3: v1(76.733,96.749) 78.461,95.021 v1(79.35,95.021)
NetJ1_A7: J1.A7 J1.B7 U1.37 | length 29.6
  Top Layer w0.3: J1.B7 74.715,96.6 73.965,97.35 J1.A7 72.796,97.35 72.796,100.813 73.965,101.981 76.403,101.981 76.657,101.727 76.657,99.466 v1(77.851,98.273) ; v1(77.089,112.09) 77.15,112.029 U1.37
  Bottom Layer w0.3: v1(77.089,112.09) 77.3,111.879 77.3,103.091 77.851,102.54 v1(77.851,98.273)
NetJ1_B5: J1.B5 R20.1 | length 9.9
  Top Layer w0.3: J1.B5 76.896,97.6 77.36,97.136 77.36,93.585 77.225,93.45 77.225,92.392 76.7,91.867 76.7,91.203 76.276,90.78 75.79,90.78 R20.1
NetQ1_3: Q1.3 U2.10 | length 9
  Bottom Layer w0.3: U2.10 64.25,85.973 65.278,87.001 65.278,88.392 65.586,88.7 Q1.3
NetR1_1: R1.1 U1.44 | length 10.8
  Top Layer w0.3: U1.44 73.65,112.024 73.592,112.082 73.592,112.979 74.202,113.589 78.24,113.589 v1(79.629,112.2)
  Bottom Layer w0.3: v1(79.629,112.2) R1.1
NetR2_1: R2.1 R5.1 R6.2 U4.22 | length 65.1
  Top Layer w0.3: R6.2 51.562,85.045 51.617,84.99 R2.1 53.289,84.99 53.289,85.75 53.619,86.081 58.165,86.081 60.502,88.418 60.502,91.386 59.942,91.946 59.942,104.182 60.96,105.2 U4.22@62.586,105.2 ; v1(61.189,109.652) 62.586,108.255 U4.22@62.586,105.2 ; v1(61.189,111.709) 63.551,114.071 80.543,114.071 81.597,113.018 81.597,110.223 v1(80.721,109.347) ; U4.22 U4.22@62.586,105.2
  Bottom Layer w0.3: v1(61.189,109.652) v1(61.189,111.709) ; v1(80.721,109.347) 80.967,109.347 81.559,108.755 R5.1
NetR4_1: R4.1 R7.1 R8.2 U4.21 | length 82.7
  Top Layer w0.3: R4.1 R4.1@54.61,84.99 ; v1(60.605,77.953) 59.967,78.591 59.967,79.633 R4.1@54.61,84.99 ; U4.21 60.588,103.2 60.394,103.006 60.394,92.506 61.104,91.796 61.104,88.116 57.933,84.945 R8.2 56.06,84.945 55.849,84.734 55.412,84.734 55.156,84.99 R4.1@54.61,84.99 ; v1(80.01,85.623) 80.899,86.512 80.899,87.859 v1(81.051,87.859) ; v1(80.355,90.576) 80.207,90.725 80.207,93.444 80.874,94.111 80.874,98.806 v1(81.026,98.806)
  Bottom Layer w0.3: v1(60.605,77.953) 67.279,77.953 68.332,76.9 71,76.9 71.4,77.3 73.071,77.3 74.143,78.371 79.54,78.371 80.01,78.842 v1(80.01,85.623) ; v1(80.355,90.576) 80.355,88.555 v1(81.051,87.859) ; v1(81.026,98.806) 82.474,100.254 82.474,103.345 R7.1
NetR5_2: R5.2 U1.31 | length 4.9
  Top Layer w0.3: U1.31 79.523,108.05 79.851,107.721 v1(81.153,107.721)
  Bottom Layer w0.3: v1(81.153,107.721) 81.26,107.614 81.26,106.845 R5.2
NetR7_2: R7.2 U1.30 | length 28.2
  Top Layer w0.3: U1.30 78.952,107.55 79.213,107.29 79.213,99.792 79.382,99.623 79.382,96.189 78.723,95.529 78.723,94.485 79.007,94.2 79.85,94.2 80.391,94.741 80.391,100.457 80.239,100.609 80.239,103.327 v1(81.28,104.369)
  Bottom Layer w0.3: v1(81.28,104.369) 81.28,105.255 R7.2
NetR9_2: R9.2 R11.2 U2.9 | length 13
  Bottom Layer w0.3: U2.9 64.73,85.344 66.31,86.924 R9.2 66.31,88 69.102,88 69.291,88.189 69.291,89.002 68.707,89.586 66.31,89.586 R11.2
NetR10_1: R10.1 R12.2 R14.2 U2.6 | length 65.9
  Top Layer w0.3: R10.1 70.104,98.055 ; v1(70.612,84.455) 70.104,84.963 v1(70.104,86.665) 70.104,98.055 ; R14.2 70.104,98.055 ; v1(78.892,110.922) 79.448,110.922 80.693,112.166 v1(80.693,112.957)
  Bottom Layer w0.3: U2.6 66.17,85.02 67.815,86.665 v1(70.104,86.665) ; v1(70.612,84.455) 76.055,84.455 77.858,86.258 81.642,86.258 82.474,87.09 82.474,95.834 78.892,99.416 v1(78.892,110.922) ; R12.2 79.155,113.614 80.035,113.614 v1(80.693,112.957)
NetR12_1: R12.1 U1.42 | length 6
  Top Layer w0.3: U1.42 74.65,111.864 74.868,112.082 74.868,112.573 75.085,112.79 77.552,112.79 v1(77.795,112.547)
  Bottom Layer w0.3: R12.1 77.245,113.097 v1(77.795,112.547)
NetR13_1: R13.1 R16.2 R17.2 U2.5 | length 76.5
  Top Layer w0.3: R17.2 66.408,98.055 ; v1(66.092,78.892) 66.092,83.311 ; v1(69.926,81.636) 67.767,81.636 66.092,83.311 ; 66.092,83.311 66.092,97.739 ; 66.092,97.739 66.408,98.055 ; 66.092,97.739 R13.1 66.408,98.055
  Bottom Layer w0.3: v1(66.092,78.892) 66.65,79.449 U2.5 ; v1(69.926,81.636) 69.926,84.938 70.18,85.192 74.692,85.192 76.322,86.822 81.08,86.822 81.691,87.434 81.691,90.826 80.051,92.466 80.051,95.723 78.14,97.634 77.419,97.634 77.216,97.837 77.216,102.536 76.462,103.29 76.462,112.756 75.655,113.563 R16.2
NetR16_1: R16.1 U1.43 | length 2.8
  Top Layer w0.3: U1.43 74.15,112.631 v1(74.219,112.7)
  Bottom Layer w0.3: R16.1 73.745,113.563 74.219,113.09 v1(74.219,112.7)
NetR22_1: R22.1 U5.6 | length 2.7
  Top Layer w0.3: U5.6 67.234,72.13 67.279,72.175 R22.1
NetR23_1: R23.1 U5.7 | length 2.8
  Top Layer w0.3: U5.7 67.081,73.4 67.426,73.745 R23.1
NetR24_1: R24.1 U5.2 | length 7
  Top Layer w0.3: R24.1 57.875,75.655 57.607,75.387 57.607,73.161 57.794,72.974 59.538,72.974 59.963,73.4 U5.2
NetSW1_1: SW1.1 SW1.3 U1.10 | length 77.5
  Top Layer w0.3: v1(58.598,110.846) 62.352,114.6 81.132,114.6 82.474,113.259 82.474,85.827 81.6,84.953 SW1.1 81.392,83 80.112,84.28 SW1.3 ; v1(63.221,106.731) 64.451,105.5 69.309,105.5 69.859,106.05 U1.10
  Bottom Layer w0.3: v1(58.598,110.846) 57.7,109.948 57.7,107.375 59.004,106.07 62.56,106.07 v1(63.221,106.731)
NetU1_11: U1.11 U2.16 | length 40.4
  Top Layer w0.3: v1(61.62,79.807) 63.902,82.088 63.902,92.102 61.474,92.102 60.846,92.73 60.846,101.689 61.366,102.21 64.489,102.21 67.067,104.788 69.647,104.788 70.409,105.55 U1.11
  Bottom Layer w0.3: U2.16 61.37,80.057 v1(61.62,79.807)
NetU1_12: U1.12 U2.15 | length 39.4
  Top Layer w0.3: v1(63.283,80.047) 64.736,81.5 64.736,93.557 63.995,94.298 61.298,94.298 61.298,100.102 63.529,100.102 67.649,104.222 70.522,104.222 70.861,104.561 70.861,105.05 U1.12
  Bottom Layer w0.3: U2.15 61.878,82.872 61.878,80.911 62.742,80.047 v1(63.283,80.047)
NetU1_13: U1.13 U2.14 | length 35
  Top Layer w0.3: v1(64.872,79.883) 65.278,80.289 65.278,94.31 64.084,95.504 64.084,99.614 68.07,103.6 71.191,103.6 71.65,104.059 U1.13
  Bottom Layer w0.3: U2.14 62.33,81.098 63.12,81.098 64.335,79.883 v1(64.872,79.883)
NetU1_15: U1.15 U2.18 | length 39.3
  Top Layer w0.3: v1(67.31,99.746) 69.864,102.3 71.572,102.3 72.65,103.378 U1.15
  Bottom Layer w0.3: U2.18 60.41,84.497 54,90.907 54,97.5 56.246,99.746 v1(67.31,99.746)
NetU1_17: U1.17 U2.17 | length 40.7
  Top Layer w0.3: U1.17 73.65,102.702 v1(73.66,102.692)
  Bottom Layer w0.3: U2.17 60.89,84.91 55.1,90.7 55.1,97.1 57,99 70.831,99 71.196,99.365 71.196,102.006 71.882,102.692 v1(73.66,102.692)
NetU1_40: U1.40 U2.2 | length 44
  Top Layer w0.3: U1.40 75.65,112.141 v1(75.692,112.141)
  Bottom Layer w0.3: U2.2 68.09,84.93 69.088,85.928 74.066,85.928 75.413,87.274 79.903,87.274 79.903,89.798 79.728,89.973 79.728,92.128 78.181,93.675 76.894,93.675 75.471,95.098 75.471,96.032 75.654,96.215 75.654,99.302 76.53,100.178 76.53,101.604 75.692,102.442 v1(75.692,112.141)
NetU1_46: U1.46 U2.4 | length 50.7
  Top Layer w0.3: v1(59.233,96.622) v1(59.233,107.036) ; v1(67.13,84.935) 68.402,86.208 v1(68.402,95.174) ; U1.46 72.65,111.918 72.891,112.159 v1(72.891,112.191)
  Bottom Layer w0.3: v1(59.233,96.622) 60.3,97.688 65.888,97.688 v1(68.402,95.174) ; v1(59.233,107.036) 60.07,107.036 63.303,110.269 70.969,110.269 v1(72.891,112.191) ; U2.4 v1(67.13,84.935)
USB_VBUS: J1.A4 J1.A9 J1.B4 J1.B9 R3.2 | length 63.1
  Top Layer w0.3: v1(57.785,71.196) 57.861,71.272 57.861,71.661 58.375,72.175 R3.2 ; v1(72.669,94.717) 72.847,94.894 72.847,95.85 J1.A4 ; v1(72.873,92.227) 75.006,90.094 75.006,89.05 76.392,87.664 76.392,77.437 v1(76.273,77.318) ; J1.A9 74.219,98.35 v1@74.469,98.1 ; v1(74.447,98.095) 74.453,98.1 v1@74.469,98.1 ; J1.B9 75.94,95.6 v1(76.098,95.758) ; v1(76.479,98.577) 76.002,98.1 J1.B4 v1@74.469,98.1
  Bottom Layer w0.3: v1(57.785,71.196) 58.387,70.595 59.131,70.595 60.123,71.586 60.123,73.077 62.586,75.54 64.033,75.54 69.088,70.485 69.977,70.485 70.7,71.208 70.7,75.196 72.104,76.6 73.73,76.6 75.049,77.919 75.672,77.919 v1(76.273,77.318) ; v1(72.669,94.717) v1@72.72,94.767 ; v1(72.873,92.227) 72.873,94.615 v1@72.72,94.767 ; v1(74.447,98.095) 73,96.647 73,95.047 v1@72.72,94.767 ; v1(76.098,95.758) 76.106,95.766 76.106,98.204 v1(76.479,98.577)
VBAT: C6.1 C8.1 J2.1 U3.3 U5.5 | length 41.1
  Top Layer w0.3: v1(62.713,70.536) 62.967,70.79 64.928,70.79 U5.5 67.056,70.86 67.462,70.454 67.462,69.698 67.666,69.494 70.497,69.494 70.7,69.698 C8.1
  Bottom Layer w0.3: J2.1 46.385,76.403 47.884,74.905 U3.3@48.82,74.905 ; U3.3 U3.3@48.82,74.905 ; v1(62.713,70.536) 62.319,70.143 48.527,70.143 47.55,71.12 C6.1 47.55,72.746 48.82,74.016 U3.3@48.82,74.905
pads on no net: J1. J1.A2 J1.A3 J1.A8 J1.A10 J1.A11 J1.B2 J1.B3 J1.B8 J1.B10 J1.B11 U1.1 U1.2 U1.18 U1.19 U1.20 U1.21 U1.22 U1.25 U1.26 U1.27 U1.28 U1.32 U1.33 U1.38 U1.39 U1.41 U1.45 U1.49 U2.19 U2.S1 U2.S2 U4.1 U4.2 U4.3 U4.4 U4.5 U4.6 U4.7 U4.9 U4.10 U4.11 U4.12 U4.13 U4.14 U4.16 U4.17 U4.18 U4.19 U4.20 U5.9 Y2.2 Y2.4

## Polygon pours and split planes (outlines as drawn)
GND on Top Layer "Top Layer-GND" (solid, remove dead copper, pour order 1): 47,69 cw(c47,71) 45,71 45,113 cw(c47,113) 47,115 81,115 cw(c81,113) 83,113 83,71 cw(c81,71) 81,69
GND on Bottom Layer "Top Layer-GND" (solid, remove dead copper, pour order 2): 47,69 cw(c47,71) 45,71 45,113 cw(c47,113) 47,115 81,115 cw(c81,113) 83,113 83,71 cw(c81,71) 81,69

## Silkscreen, mask and mechanical layers (free items; w line width, h text height)
Mechanical 1:
  the board outline again, w0.254